# Altium PCB BEAGLEPLAYV020_220915.brd.PcbDoc (part 8 of 12)
Units mil, origin at the board's own origin, x right, y up, seen from the top; angles counter-clockwise.
Board outline 3149.7 x 3149.7 mil, 8 copper layers (TOP, LYR2_GND, LYR3, LAY4_PWR1, LAY5_PWR2, LAY6, LYR7_GND, BOTTOM), stack 60.84 mil thick; 782 components, 546 nets, 2864 pads, 2056 vias.
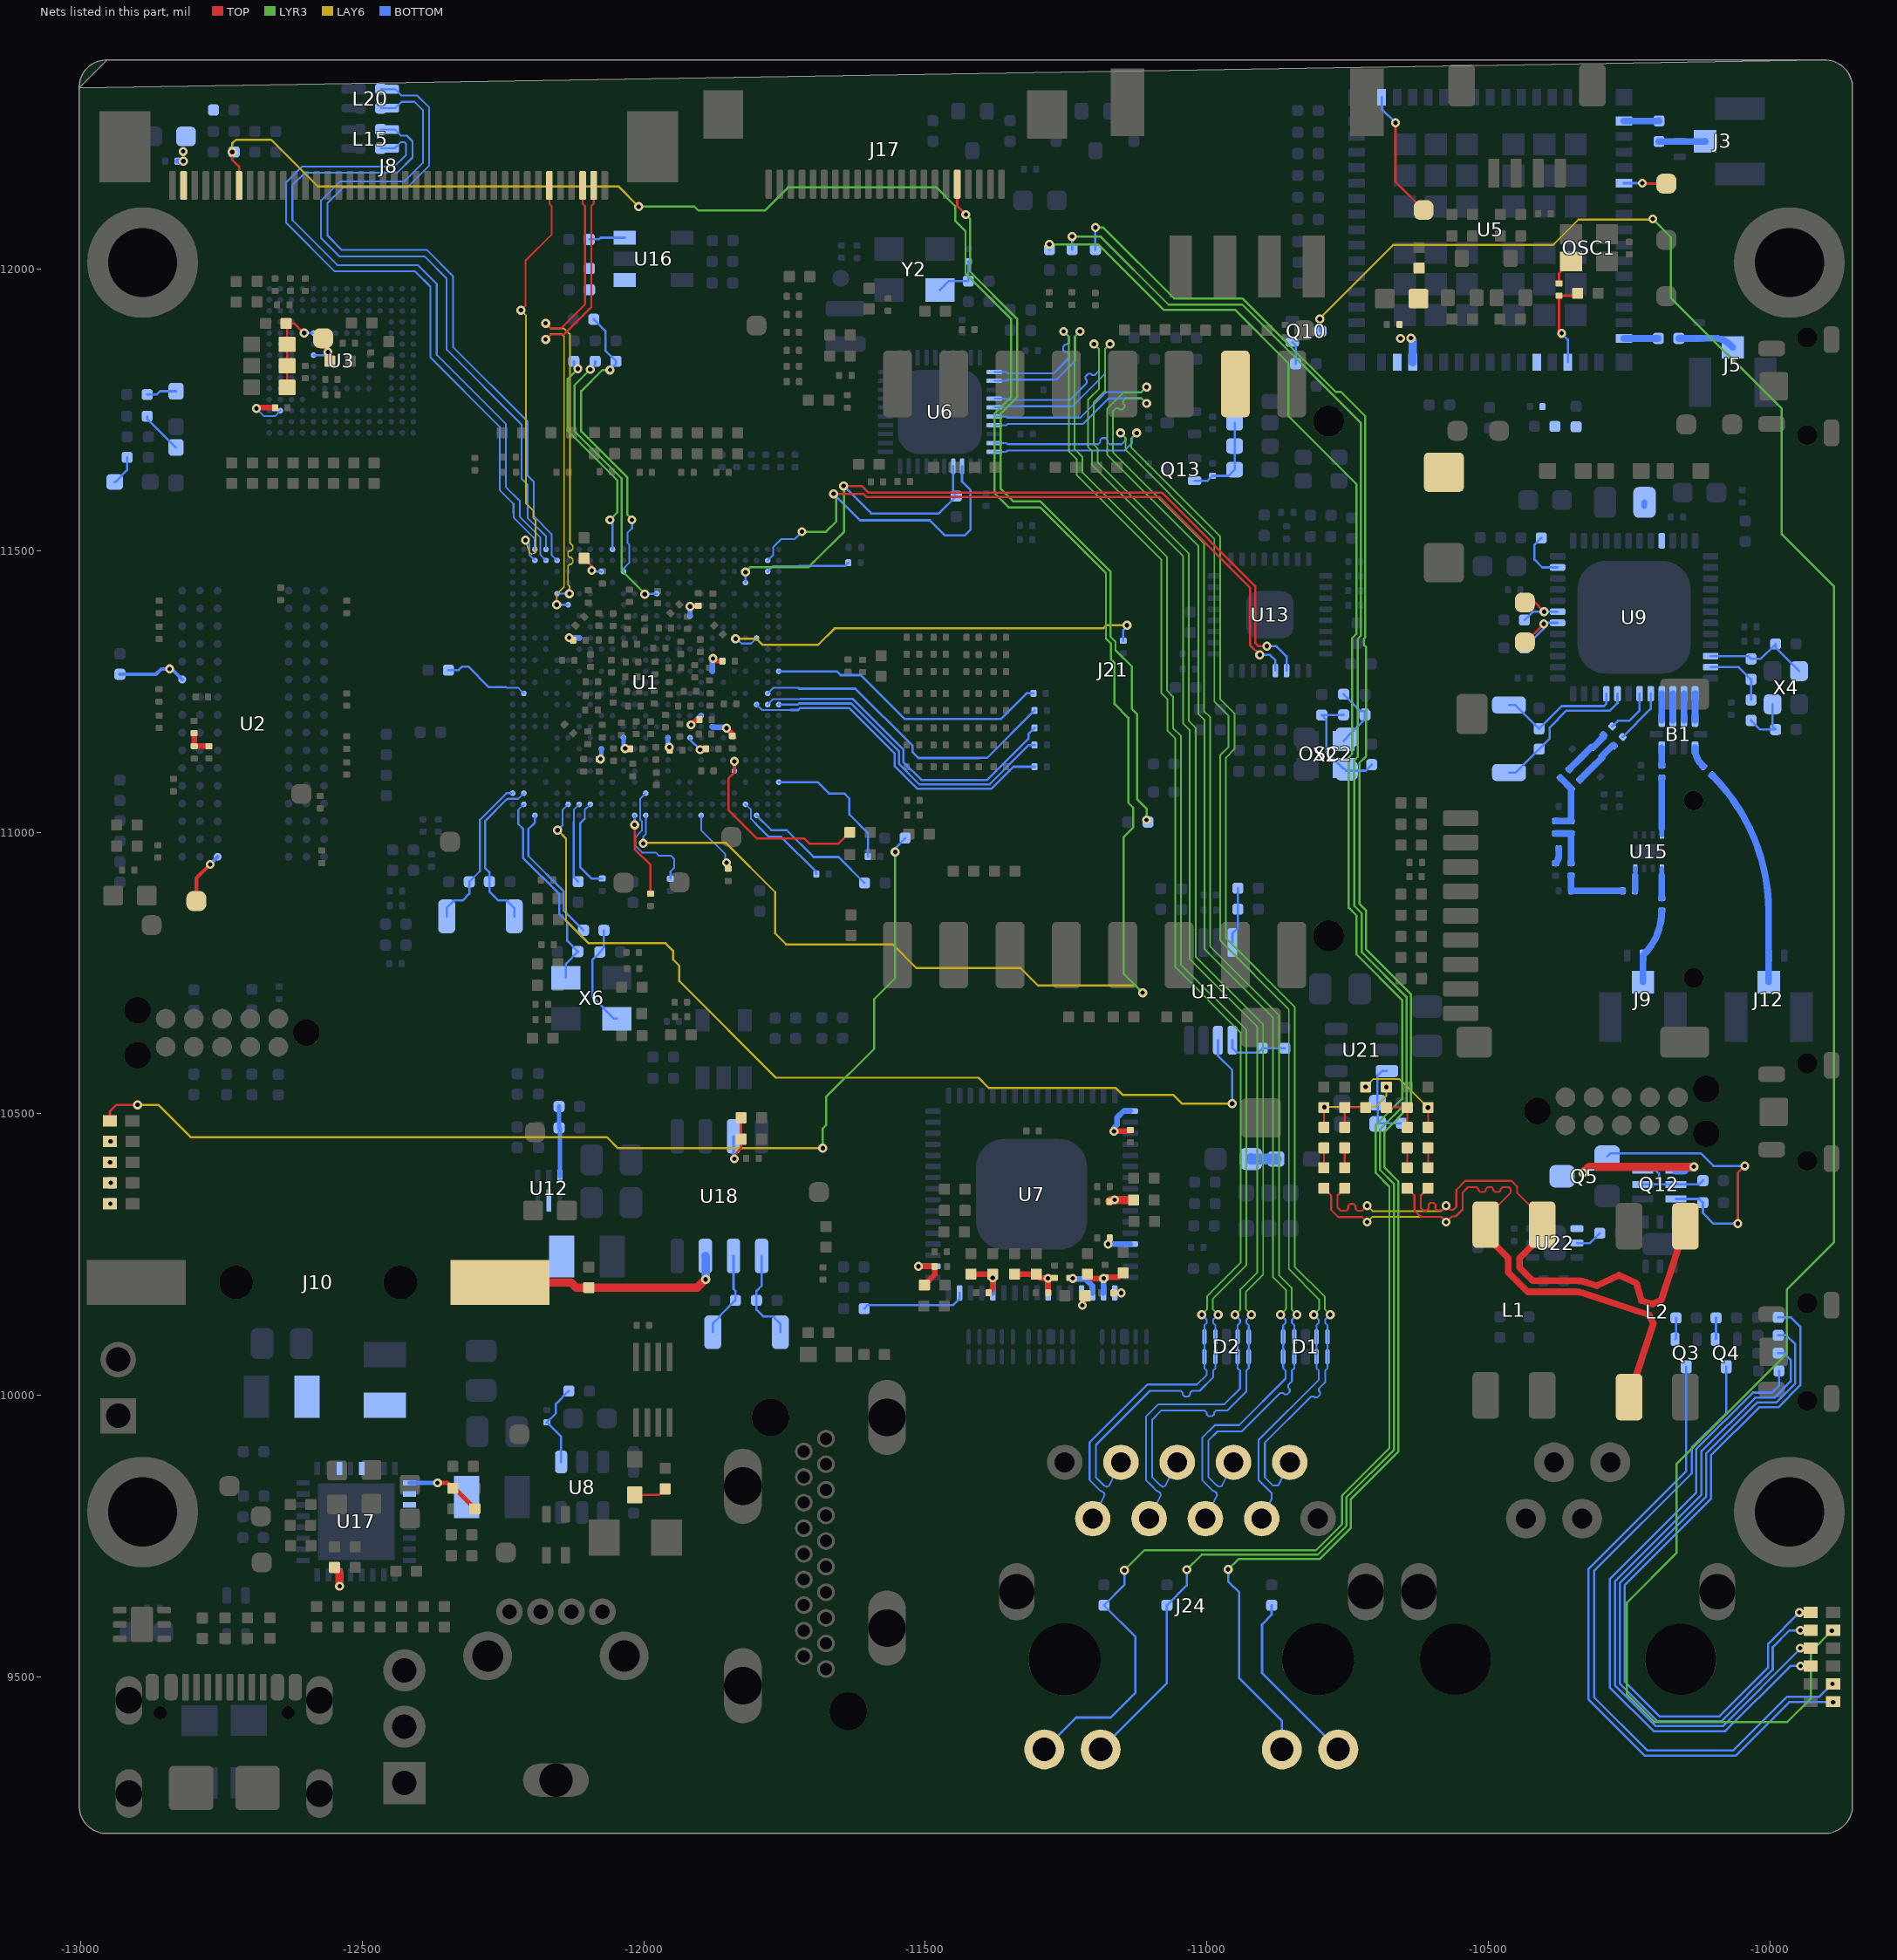
[diagram p14: the nets of this part, all layers, seen from the top]

## Via types
v1: diameter 16/0/16/0/0/0/0/16 (per signal layer), hole 8, TOP to BOTTOM, 334 vias
v2: diameter 16/16/0/0/0/0/16/16 (per signal layer), hole 8, TOP to BOTTOM, 282 vias
v3: diameter 16/0/0/0/0/16/0/16 (per signal layer), hole 8, TOP to BOTTOM, 255 vias
v4: diameter 16/16/0/0/0/16/16/16 (per signal layer), hole 8, TOP to BOTTOM, 253 vias
v5: diameter 16, hole 8, TOP to BOTTOM, 212 vias
v6: diameter 16/16/16/0/0/16/16/16 (per signal layer), hole 8, TOP to BOTTOM, 173 vias
v7: diameter 16/0/0/16/0/0/0/16 (per signal layer), hole 8, TOP to BOTTOM, 131 vias
v8: diameter 16/0/0/0/16/0/0/16 (per signal layer), hole 8, TOP to BOTTOM, 98 vias
v9: diameter 16/16/0/16/0/0/16/16 (per signal layer), hole 8, TOP to BOTTOM, 93 vias
v10: diameter 16/0/16/0/0/16/0/16 (per signal layer), hole 8, TOP to BOTTOM, 87 vias
v11: diameter 16/16/0/16/0/16/16/16 (per signal layer), hole 8, TOP to BOTTOM, 44 vias
v12: diameter 16/16/16/16/0/16/16/16 (per signal layer), hole 8, TOP to BOTTOM, 40 vias
v13: diameter 16/16/16/0/0/0/16/16 (per signal layer), hole 8, TOP to BOTTOM, 19 vias
v14: diameter 16/0/0/16/0/16/0/16 (per signal layer), hole 8, TOP to BOTTOM, 15 vias
v15: diameter 16/0/0/0/16/16/0/16 (per signal layer), hole 8, TOP to BOTTOM, 13 vias
v16: diameter 16/0/16/0/16/0/0/16 (per signal layer), hole 8, TOP to BOTTOM, 3 vias
v17: diameter 16/0/16/16/0/0/0/16 (per signal layer), hole 8, TOP to BOTTOM, 3 vias
v18: diameter 16/16/16/16/0/0/16/16 (per signal layer), hole 8, TOP to BOTTOM, 1 vias

## Nets (pads, with @x,y where several pads share a name; then routed paths per layer and width w, separated by ;. In a path a pad name is that pad's centre, name@x,y a point inside that pad or via, vN(x,y) a via of type N, cw(c..) or ccw(c..) an arc to the next point about the centre after c; other vN are vias at no path point) (continued)
MCU_SPI1_D1: U1.B6 U11.6 | length 1686.2
  LAY6 w3.8: v3(-12153,11003.7) -12138,10988.7 -12138,10843 -12098,10803 -11961.34,10803 -11948,10789.66 -11948,10780 -11947.8,10779.8 -11947.8,10773.8 -11937,10763 -11937,10735.96 -11765.24,10564.2 -11405.48,10564.2 -11387.1,10545.82 -11161.59,10545.82 -11149.17,10533.4 -11059.36,10533.4 -11044.16,10518.2 v3(-10955,10518.2)
  BOTTOM w3.2: v3(-12153,11003.7) -12144.1,11012.6 -12144.1,11039.86 U1.B6@-12134.3,11049.66
  BOTTOM w4: U11.6@-10980.23,10630.76 -10980.23,10603.23 -10955,10578 v3(-10955,10518.2)
MDI0+: D2.5 D2.6 J24.2 U6.1 | length 2637.2
  LYR3 w3: v1(-11254.42,11889.43) -11245,11880.01 -11245,11675.99 -11231,11661.99 -11231,11634.43 -11081,11484.43 -11081,11247.43 -11070.3,11236.73 -11070.3,11180.74 -11056,11166.44 -11056,10760.43 -10940,10644.43 -10940,10235.57 -10999.68,10175.89 -10999.68,10152.63 v1(-11009.03,10143.28)
  BOTTOM w3.3: U6.1@-11377.67,11817.29 -11356.17,11817.29 -11353.94,11815.06 -11271.94,11815.06 -11245,11842 -11245,11849.48 -11248.3,11852.78 -11251.7,11852.78 -11255,11856.08 -11255,11862.68 -11251.7,11865.98 -11248.3,11865.98 -11245,11869.28 -11245,11880.01 v1(-11254.42,11889.43) ; J24.2@-11202.58,9781.2 -11181.56,9823.17 -11183.05,9827.6 -11188.9,9830.53 -11208.23,9849.87 -11208.23,9916.76 -11105.69,10019.3 -11017.48,10019.3 -11000.18,10036.6 -11000.18,10044.03 -11004.37,10048.22 D2.5@-11004.37,10068.65 D2.6@-11004.37,10104.09 -11004.37,10124.52 -11000.18,10128.71 -11000.18,10134.43 v1(-11009.03,10143.28)
MDI0-: D2.4 D2.7 J24.3 U6.2 | length 2642.4
  LYR3 w3: v1(-11225.42,11889.43) -11234.7,11880.15 -11234.7,11680.26 -11220.7,11666.26 -11220.7,11638.7 -11070.7,11488.7 -11070.7,11251.7 -11060,11241 -11060,11185.01 -11045.7,11170.71 -11045.7,10764.7 -10929.7,10648.7 -10929.7,10231.3 -10989.38,10171.62 -10989.38,10152.63 v1(-10980.03,10143.28)
  BOTTOM w3.3: U6.2@-11377.67,11801.54 -11356.16,11801.54 -11353.94,11803.76 -11267.25,11803.76 -11233.7,11837.31 -11233.7,11881.15 v1(-11225.42,11889.43) ; J24.3@-11152.58,9881.2 -11173.61,9839.21 -11178.04,9837.74 -11182.2,9839.82 -11196.93,9854.55 -11196.93,9912.07 -11101,10008 -11046.13,10008 -11042.83,10004.7 -11042.83,10001.3 -11039.53,9998 -11032.93,9998 -11029.63,10001.3 -11029.63,10004.7 -11026.33,10008 -11012.79,10008 -10988.88,10031.91 -10988.88,10044.03 -10984.69,10048.22 D2.4@-10984.69,10068.65 D2.7@-10984.69,10104.09 -10984.69,10124.52 -10988.88,10128.71 -10988.88,10134.43 v1(-10980.03,10143.28)
MDI1+: D2.2 D2.9 J24.4 U6.4 | length 2672.3
  LYR3 w3: v1(-11200.47,11867) -11191.3,11857.83 -11191.3,11787.71 -11211.3,11767.71 -11211.3,11684.74 -11204.3,11677.74 -11204.3,11652.73 -11042.3,11490.73 -11042.3,11193.3 -11030.3,11181.3 -11030.3,10774.73 -10910.3,10654.73 -10910.3,10218.7 -10940.62,10188.38 -10940.62,10152.63 v1(-10949.97,10143.28)
  BOTTOM w3.3: U6.4@-11377.67,11770.04 -11356.17,11770.04 -11353.94,11767.81 -11243.19,11767.81 -11213.15,11797.85 -11213.15,11802.51 -11215.49,11804.85 -11215.49,11809.51 -11210.81,11814.19 -11206.15,11814.19 -11203.81,11811.85 -11199.15,11811.85 -11191.8,11819.2 -11191.8,11858.33 v1(-11200.47,11867) ; J24.4@-11102.58,9781.2 -11081.56,9823.17 -11083.05,9827.6 -11088.9,9830.53 -11097.56,9839.19 -11108.23,9849.87 -11108.23,9961.76 -11085.69,9984.3 -10968.7,9984.3 -10941.12,10011.88 -10941.12,10044.03 -10945.31,10048.22 D2.2@-10945.31,10068.65 D2.9@-10945.31,10104.09 -10945.31,10124.52 -10941.12,10128.71 -10941.12,10134.43 v1(-10949.97,10143.28)
MDI1-: D2.1 D2.10 J24.5 U6.5 | length 2678.1
  LYR3 w3: v1(-11171.82,11867) -11181,11857.82 -11181,11783.44 -11201,11763.44 -11201,11689.01 -11194,11682.01 -11194,11657 -11032,11495 -11032,11197.57 -11020,11185.57 -11020,10779 -10900,10659 -10900,10214.43 -10930.32,10184.11 -10930.32,10152.63 v1(-10920.97,10143.28)
  BOTTOM w3.3: U6.5@-11377.67,11754.29 -11356.16,11754.29 -11353.94,11756.51 -11238.5,11756.51 -11180.5,11814.51 -11180.5,11858.32 v1(-11171.82,11867) ; J24.5@-11052.58,9881.2 -11073.61,9839.21 -11078.04,9837.74 -11082.19,9839.82 -11096.93,9854.56 -11096.93,9957.07 -11081,9973 -11003.63,9973 -11000.33,9969.7 -11000.33,9966.3 -10997.03,9963 -10990.43,9963 -10987.13,9966.3 -10987.13,9969.7 -10983.83,9973 -10964.01,9973 -10929.82,10007.19 -10929.82,10044.03 -10925.63,10048.22 D2.1@-10925.63,10068.65 D2.10@-10925.63,10104.09 -10925.63,10124.52 -10929.82,10128.71 -10929.82,10134.43 v1(-10920.97,10143.28)
MDI2+: D1.5 D1.6 J24.6 U6.6 | length 2596.7
  LYR3 w3: v1(-11107,11790.57) -11116.57,11781 -11148,11781 -11176.98,11752.02 -11176.98,11670.41 -11015.3,11508.73 -11015.3,11210.73 -11004.3,11199.73 -11004.3,10792.73 -10882.3,10670.73 -10882.3,10209.73 -10859.68,10187.11 -10859.68,10152.63 v1(-10869.03,10143.28)
  BOTTOM w3.3: U6.6@-11377.67,11738.55 -11356.16,11738.55 -11353.94,11736.33 -11224.67,11736.33 -11179.28,11781.72 -11115.85,11781.72 v1(-11107,11790.57) ; J24.6@-11002.58,9781.2 -10981.56,9823.17 -10983.05,9827.6 -10988.9,9830.53 -11008.3,9849.94 -11008.3,9924.69 -10985.69,9947.3 -10942.69,9947.3 -10860.18,10029.81 -10860.18,10044.03 -10864.37,10048.22 D1.5@-10864.37,10068.65 D1.6@-10864.37,10104.09 -10864.37,10124.52 -10860.18,10128.71 -10860.18,10134.43 v1(-10869.03,10143.28)
MDI2-: D1.4 D1.7 J24.7 U6.7 | length 2591.8
  LYR3 w3: v1(-11107,11761.57) -11116.13,11770.7 -11143.73,11770.7 -11148.72,11765.71 -11148.72,11761.48 -11146.24,11759 -11146.24,11754.76 -11150.49,11750.51 -11154.73,11750.51 -11157.21,11752.98 -11161.45,11752.98 -11166.68,11747.75 -11166.68,11674.68 -11005,11513 -11005,11215 -10994,11204 -10994,10797 -10872,10675 -10872,10214 -10849.38,10191.38 -10849.38,10152.63 v1(-10840.03,10143.28)
  BOTTOM w3.3: U6.7@-11377.67,11722.8 -11356.17,11722.8 -11353.94,11725.03 -11219.98,11725.03 -11174.59,11770.42 -11115.85,11770.42 v1(-11107,11761.57) ; J24.7@-10952.58,9881.2 -10973.61,9839.21 -10978.04,9837.74 -10982.19,9839.82 -10997,9854.63 -10997,9920 -10981,9936 -10938,9936 -10869.51,10004.49 -10864.85,10004.49 -10862.01,10001.65 -10857.35,10001.65 -10852.67,10006.33 -10852.67,10010.99 -10855.51,10013.83 -10855.51,10018.49 -10848.88,10025.12 -10848.88,10044.03 -10844.69,10048.22 D1.4@-10844.69,10068.65 D1.7@-10844.69,10104.09 -10844.69,10124.52 -10848.88,10128.71 -10848.88,10134.43 v1(-10840.03,10143.28)
MDI3+: D1.2 D1.9 J24.8 U6.9 | length 2423.2
  LYR3 w3: v1(-11153.18,11709) -11144.3,11700.12 -11144.3,11678.74 -10986.8,11521.24 -10986.8,11232.23 -10961.3,11206.73 -10961.3,11151.71 -10976.3,11136.71 -10976.3,10807.74 -10854.3,10685.74 -10854.3,10224.3 -10800.62,10170.62 -10800.62,10152.63 v1(-10809.97,10143.28)
  BOTTOM w3.3: U6.9@-11377.67,11691.3 -11356.17,11691.3 -11353.94,11689.07 -11192.78,11689.07 -11189.48,11692.37 -11189.48,11696.7 -11186.18,11700 -11179.58,11700 -11176.28,11696.7 -11176.28,11692.37 -11172.98,11689.07 -11151.08,11689.07 -11144.5,11695.65 -11144.5,11700.32 v1(-11153.18,11709) ; J24.8@-10902.58,9781.2 -10885.14,9816.02 -10885.14,9826.81 -10908.23,9849.87 -10908.23,9920.77 -10801.12,10027.88 -10801.12,10044.03 -10805.31,10048.22 D1.2@-10805.31,10068.65 D1.9@-10805.31,10104.09 -10805.31,10124.52 -10801.12,10128.71 -10801.12,10134.43 v1(-10809.97,10143.28)
MDI3-: D1.1 D1.10 J24.9 U6.10 | length 2427.6
  LYR3 w3: v1(-11124.53,11709) -11134,11699.53 -11134,11683.01 -10976.5,11525.51 -10976.5,11236.5 -10951,11211 -10951,11147.44 -10966,11132.44 -10966,10812.01 -10844,10690.01 -10844,10228.57 -10790.32,10174.89 -10790.32,10152.63 v1(-10780.97,10143.28)
  BOTTOM w3.3: U6.10@-11377.67,11675.55 -11356.16,11675.55 -11353.94,11677.77 -11146.39,11677.77 -11133.2,11690.96 -11133.2,11700.33 v1(-11124.53,11709) ; J24.9@-10852.58,9881.2 -10873.3,9839.83 -10882.17,9839.83 -10896.93,9854.56 -10896.93,9916.08 -10814.92,9998.09 -10810.26,9998.09 -10808.42,9996.26 -10803.76,9996.26 -10799.08,10000.94 -10799.08,10005.59 -10800.92,10007.43 -10800.92,10012.09 -10789.82,10023.19 -10789.82,10044.03 -10785.63,10048.22 D1.1@-10785.63,10068.65 D1.10@-10785.63,10104.09 -10785.63,10124.52 -10789.82,10128.71 -10789.82,10134.43 v1(-10780.97,10143.28)
MDIO0_MDC: U1.AD24 U6.13 U13.12 | length 1592.2
  TOP w4: v1(-11663,11601) -11610.32,11601 -11604.62,11595.3 -11084.3,11595.3 -10923,11433.98 -10923,11332 -10906.07,11315.07 v5(-10906.07,11314.91)
  LYR3 w3.8: -11697,11533.7 -11676.3,11533.7 -11658,11552 -11658,11596 v1(-11663,11601)
  LYR3 w4: v1(-11719,11533.7) -11697,11533.7
  BOTTOM w3.2: U1.AD24@-11779.96,11482.74 -11770.08,11492.62 -11770.08,11506.62 -11756,11520.7 -11732,11520.7 v1(-11719,11533.7)
  BOTTOM w4: v1(-11663,11601) -11616,11554 -11492,11554 -11465,11527 -11430,11527 -11420,11537 -11420,11608 -11434.76,11622.76 U6.13@-11434.76,11649.96 ; v5(-10906.07,11314.91) -10887.91,11314.91 -10878.15,11305.15 U13.12@-10878.15,11287
MDIO0_MDIO: R263.2 U1.AB22 U6.14 U13.11 | length 1590.1
  TOP w4: v1(-11645,11615) -11613,11615 -11601.3,11603.3 -11080.3,11603.3 -10914,11437 -10914,11336 -10908.4,11330.4 v5(-10893.41,11330.4)
  LYR3 w3.8: -11697,11481 -11644,11534 -11644,11614 v1(-11645,11615)
  LYR3 w4: v1(-11819.34,11462) -11810.34,11471 -11707,11471 -11697,11481
  BOTTOM w4: U1.AB22@-11819.34,11443.36 v1(-11819.34,11462) ; v1(-11645,11615) -11596,11566 -11475.96,11566 R263.2@-11445,11596.96 -11450.51,11602.47 U6.14@-11450.51,11649.96 ; v5(-10893.41,11330.4) -10876.4,11330.4 -10858.45,11312.45 U13.11@-10858.45,11287
MST_RST_3V3: J8.34 R242.1 U1.A13 | length 4147.2
  TOP w4: v3(-12731,12208) -12731,12194.5 -12718.75,12182.25 J8.34@-12718.75,12148.55
  LYR3 w3.8: v10(-12009,12111) -11910,12111 -11903,12104 -11785,12104 -11744,12145 -11479.99,12145 -11447,12112.01 -11447,12086 -11428.6,12067.6 -11428.6,11992.52 -11348,11911.92 -11348,11772.56 -11377.04,11743.52 -11377.04,11602.04 -11352,11577 -11296.23,11577 -11247.53,11528.3 -11247.44,11528.3 -11215.8,11496.66 -11215.8,11496.57 -11179.2,11459.97 -11179.2,11344.24 -11170,11335.04 -11170,11307 -11163.9,11300.9 -11163.9,11227.63 -11139.6,11203.33 -11139.6,11052.52 -11131,11043.92 -11131,11008 -11148,10991 -11148,10749 v10(-11114,10715)
  LAY6 w3.8: v3(-12731,12208) -12731,12223 -12724,12230 -12662,12230 -12579,12147 -12045,12147 v10(-12009,12111) ; v3(-12001.06,10980.21) -12000.27,10981 -11854,10981 -11766.66,10893.66 -11766.66,10820.34 -11747.32,10801 -11558,10801 -11515.7,10758.7 -11330.7,10758.7 -11300,10728 -11127,10728 v10(-11114,10715)
  BOTTOM w3.2: v3(-12001.06,10980.21) -12001.06,10991.94 -11996.5,10996.5 U1.A13@-11996.5,11029.98
N8480473: C76.1 U3.C2 | length 86.1
  TOP w10: v5(-12688,11752.7) -12686.66,11754.04 C76.1@-12654.84,11754.04
  BOTTOM w3.2: v5(-12688,11752.7) -12674.21,11738.91 -12655.19,11738.91 U3.C2@-12645.39,11748.71
N8487606: R80.1 U1.B22 | length 188.6
  BOTTOM w3.2: U1.B22@-11819.34,11049.66 -11809.54,11039.86 -11809.54,11023.54 -11801,11015
  BOTTOM w4: -11801,11015 -11778,10992 -11756,10992 -11693.7,10929.7 R80.1@-11693.7,10926
N8498391: R79.1 U1.D25 | length 254
  BOTTOM w3.8: R79.1@-11602,10956.95 -11602,10998.68
  BOTTOM w4: U1.D25@-11760.28,11089.04 -11691.04,11089.04 -11671,11069 -11644,11069 -11635,11060 -11635,11031.68 -11602,10998.68
N8502406: D47.1 D48.1 D56.1 R14.2 U3.K5 | length 170.1
  TOP w4: D56.1@-12633.48,11790 D48.1@-12633.48,11828.42 D47.1@-12633.48,11866.36 -12633.48,11901.89 R14.2@-12635.15,11903.56 -12620.26,11903.56 v5(-12603.2,11886.5)
  BOTTOM w4: v5(-12603.2,11886.5) U3.K5@-12586.33,11886.5
N8504005: TP6.1 U5.2 | length 231.1
  TOP w4: v5(-10665,12260) -10665,12155 TP6.1@-10615,12105
  BOTTOM w4: U5.2@-10689.55,12305.24 -10689.55,12284.55 v5(-10665,12260)
N8504092: TP7.1 U5.22 | length 75.9
  TOP w4: v5(-10226.68,12152.68) -10225.89,12151.89 TP7.1@-10183.83,12151.89
  BOTTOM w4: U5.22@-10259.44,12152.68 v5(-10226.68,12152.68)
N8504621: C83.1 C84.1 FB1.2 U5.46 U5.47 | length 44
  BOTTOM w15: v5(-10637.5,11877.5) -10634.44,11874.44 U5.46@-10634.44,11834.76
  other v5: -10656,11877
N8505525: C85.1 C86.1 FB2.2 U5.38
N8507580: C256.1 U5.18 | length 62.6
  BOTTOM w12: U5.18@-10259.44,12262.91 -10197.3,12262.91 C256.1@-10197,12263.21
N8507584: C257.1 U5.32 | length 61.3
  BOTTOM w12: U5.32@-10259.44,11877.09 -10198.3,11877.09 C257.1@-10198.21,11877
N8521467: OSC1.3 R31.1 | length 47.6
  TOP w4: R31.1@-10374.5,11974.8 -10374.5,11992.38 OSC1.3@-10353.29,12013.59
N8521963: R30.2 R31.2 U5.36 | length 159.4
  TOP w4: v5(-10370,11886) -10374.5,11890.5 R31.2@-10374.5,11952.8 -10345.61,11952.8 R30.2@-10341.41,11957
  BOTTOM w4: v5(-10370,11886) -10358.84,11874.84 U5.36@-10358.84,11834.76
N8554336: R258.1 U7.17 | length 25.3
  TOP w4: R258.1@-11165.7,10182 v5(-11152,10182)
  BOTTOM w4: U7.17@-11163.59,10182 v5(-11152,10182)
N15874060: R1.1 U2.F9 | length 122.4
  BOTTOM w6.6: R1.1@-12930.44,11280.59 -12866.33,11280.56 -12856.89,11290 v5(-12842.09,11290) -12838.21,11290 U2.F9@-12819.66,11271.45
N15874116: TP11.1 U2.T7 | length 94.3
  TOP w6.6: TP11.1@-12794.55,10877.84 -12794.55,10918.56 v5(-12770.1,10943.01)
  BOTTOM w6.6: v5(-12770.1,10943.01) U2.T7@-12756.66,10956.45
N15878591: C82.1 R2.2 R3.2 | length 49.2
  TOP w10: C82.1@-12798.7,11176 -12798.3,11175.6 R3.2@-12798.3,11153 R2.2@-12772.3,11153
N15909544: R88.2 U1.M2 | length 156.4
  BOTTOM w3.2: -12274.85,11257.7 -12244,11257.7 -12242.62,11256.32 -12222.84,11256.32 U1.M2@-12213.04,11246.52
  BOTTOM w4: R88.2@-12346.95,11287.84 -12329.11,11287.84 -12322.65,11294.3 -12311.45,11294.3 -12274.85,11257.7
N15925896: R89.1 U7.20 | length 41.8
  TOP w4: v5(-11221,10160) -11215.79,10165.21 R89.1@-11215.79,10177
  BOTTOM w4: U7.20@-11222.65,10182 -11222.65,10161.65 v5(-11221,10160)
N15938500: C1.2 C254.1 OSC2.4 R220.1 R221.2 X2.4 | length 119.2
  BOTTOM w4: X2.4@-10757.17,11162.07 -10751.6,11167.64 OSC2.4@-10751.6,11168.53 -10719.14,11200.99 R220.1@-10719.14,11208.11 C254.1@-10719.14,11215.02 -10727.05,11215.02 C1.2@-10757.14,11245.11
N15938564: C1.1 OSC2.1 R99.2 R221.1 R222.1 X2.1 | length 206.6
  BOTTOM w4: C1.1@-10757.14,11208.69 -10757.64,11208.19 R99.2@-10795.86,11208.19 -10788,11200.33 -10788,11143 -10758.85,11113.85 X2.1@-10757.17,11113.85 -10752.79,11109.47 OSC2.1@-10751.6,11109.47 -10717.86,11109.47 R222.1@-10707.14,11120.19
N15941863: C12.1 R100.2 R104.1 | length 72.5
  TOP w3.3: C12.1@-10755.14,10475.97 R100.2@-10755.14,10511.23 R104.1@-10717.86,10511.23
N15941865: C13.1 R101.2 R105.1 | length 170.7
  TOP w3.3: C13.1@-10792.14,10475.97 R101.2@-10792.14,10511.11 v3(-10791.3,10512) ; v3(-10681.35,10547.65) R105.1@-10681.14,10547.65
  LAY6 w3: v3(-10791.3,10512) -10701,10512 -10681.35,10531.65 v3(-10681.35,10547.65)
N15941871: C15.1 R102.2 R104.2 | length 172.9
  TOP w3.3: v3(-10607.23,10511.23) R102.2@-10607.14,10511.23 C15.1@-10607.14,10475.97
  LAY6 w3: v3(-10718,10548) -10704,10562 -10658,10562 v3(-10607.23,10511.23)
N15941883: C14.1 R103.2 R105.2 | length 72.3
  TOP w3.3: R105.2@-10681.14,10511.23 R103.2@-10644.14,10511.23 C14.1@-10644.14,10475.97
N15942115: C12.2 R106.1 | length 35.2
  TOP w3.3: R106.1@-10755.14,10404.33 C12.2@-10755.14,10439.55
N15942117: C13.2 R107.1 | length 35.2
  TOP w3.3: R107.1@-10792.14,10404.33 C13.2@-10792.14,10439.55
N15942312: C15.2 R109.1 | length 35.2
  TOP w3.3: R109.1@-10607.14,10404.33 C15.2@-10607.14,10439.55
N15942316: C14.2 R108.1 | length 35.2
  TOP w3.3: R108.1@-10644.14,10404.33 C14.2@-10644.14,10439.55
N15942320: L1.2 L2.3 R107.2 R108.2 | length 1161.5
  TOP w3.3: R107.2@-10792.14,10367.91 -10779.29,10355.06 -10779.29,10329.3 -10766.69,10316.7 -10724.1,10316.7 v3(-10715.25,10307.85) ; R108.2@-10644.14,10367.91 -10631.3,10355.07 -10631.3,10328.3 -10620,10317 -10584.15,10317 v3(-10575,10307.85) -10564.89,10317.96 -10558.05,10317.96 -10545.7,10330.31 -10545.7,10360.31 -10536.31,10369.7 -10520.98,10369.7 -10517.68,10366.4 -10517.68,10364.3 -10514.38,10361 -10507.78,10361 -10504.48,10364.3 -10504.48,10366.4 -10501.18,10369.7 -10494.58,10369.7 -10491.28,10366.4 -10491.28,10364.3 -10487.98,10361 -10481.38,10361 -10478.08,10364.3 -10478.08,10366.4 -10474.78,10369.7 -10463.6,10369.7 -10460.3,10366.4 -10460.3,10360 -10504.66,10315.64 L1.2@-10504.66,10303.21
  TOP w12: L1.2@-10504.66,10303.21 -10504.66,10283.87 -10464.66,10243.87 -10464.66,10218.6 -10429.8,10183.74 -10344.36,10183.74 cw(c-10344.38,10146.12) -10332.58,10181.84 -10214.54,10142.9 -10206.89,10127.75 L2.3@-10250,9997.07
  LAY6 w3: v3(-10715.25,10307.85) -10705.9,10317.2 -10584.35,10317.2 v3(-10575,10307.85)
N15942332: L1.1 L2.1 R106.2 R109.2 | length 1156.9
  TOP w3.3: R106.2@-10755.14,10367.91 -10767.99,10355.06 -10767.99,10333.99 -10762,10328 -10752.31,10328 -10749.01,10331.3 -10749.01,10336.7 -10745.71,10340 -10739.11,10340 -10735.81,10336.7 -10735.81,10331.3 -10732.51,10328 -10724.1,10328 v3(-10715.25,10336.85) ; R109.2@-10607.14,10367.91 -10620,10355.05 -10620,10332.99 -10615.31,10328.3 -10609.7,10328.3 -10606,10332 -10606,10339 -10603,10342 -10597,10342 -10594,10339 -10594,10332.05 -10590.7,10328.75 -10583.1,10328.75 v3(-10575,10336.85) -10567.41,10329.26 -10562.74,10329.26 -10557,10335 -10557,10365 -10541,10381 -10458.91,10381 -10449,10371.09 -10449,10360 -10404.66,10315.66 L1.1@-10404.66,10303.21
  TOP w12: L1.1@-10404.66,10303.21 -10404.66,10283.87 -10444.66,10243.87 -10444.66,10226.89 -10421.51,10203.74 -10344.36,10203.74 cw(c-10344.36,10146.12) -10326.31,10200.84 -10307.67,10194.69 -10268.22,10213.46 -10237.31,10199.1 -10228.17,10168.47 -10208.26,10161.9 -10193.11,10169.53 L2.1@-10150,10300.21
  LAY6 w3: v3(-10715.25,10336.85) -10705.9,10327.5 -10584.35,10327.5 v3(-10575,10336.85)
N15956159: B1.7 U9.3 | length 47
  BOTTOM w12: B1.7@-10172.32,11198.95 U9.3@-10172.32,11245.95
N15956167: B1.4 C19.1 | length 31
  BOTTOM w12: C19.1@-10192.01,11118.73 B1.4@-10192.01,11149.73
N15956223: B1.6 U9.4 | length 47
  BOTTOM w12: B1.6@-10192.01,11198.95 U9.4@-10192.01,11245.95
N15956457: C19.2 U15.8 | length 101.6
  BOTTOM w8: U15.8@-10192.01,10995.14 -10192.01,11007
  BOTTOM w12: -10192.01,11007 C19.2@-10192.01,11096.73
N15956717: L3.2 U9.33 | length 7
  BOTTOM w10: L3.2@-10222.8,11578.8 L3.2@-10222.8,11585.78
N15956763: C21.1 U15.1 | length 53.1
  BOTTOM w8: -10192.01,10923.22 U15.1@-10192.01,10936.08
  BOTTOM w12: C21.1@-10192.01,10883 -10192.01,10923.22
N15956767: C21.2 D28.2 J9.1 | length 136.1
  BOTTOM w12: J9.1@-10225.57,10734.02 D28.2@-10225.57,10781 -10224.85,10781.72 ccw(c-10304.13,10861) C21.2@-10192.01,10861
N15956835: C25.1 U15.4 | length 40.2
  BOTTOM w8: -10239.25,10923.22 U15.4@-10239.25,10936.08
  BOTTOM w12: C25.1@-10239.57,10896 -10239.25,10896.32 -10239.25,10923.22
N15956943: C33.1 U9.8 X3.1 | length 271.9
  BOTTOM w4: X3.1@-10463.47,11106.13 -10451.3,11106.13 C33.1@-10409.64,11147.79 -10391,11166.43 -10391,11186 -10361,11216 -10283.99,11216 -10270.75,11229.24 U9.8@-10270.75,11245.95
N15956969: C34.1 U9.9 X3.2 | length 226.6
  BOTTOM w4: X3.2@-10463.47,11226.13 -10452.44,11226.13 C34.1@-10409.96,11183.65 -10369.61,11224 -10294.99,11224 -10290.43,11228.56 U9.9@-10290.43,11245.95
N15956977: C26.1 L5.1 L6.2 L7.2 | length 87.2
  BOTTOM w12: C26.1@-10337.53,11093.23 L5.1@-10316.65,11114.12 -10297.65,11133.12 L7.2@-10297.65,11135.91 -10279.81,11153.75 L6.2@-10277.01,11153.75
N15957113: L6.1 U9.5 | length 97.3
  BOTTOM w4: L6.1@-10261.45,11169.31 -10211.69,11219.07 U9.5@-10211.69,11245.95
N15957129: C26.2 C27.1 C31.1 L9.1 L11.2 | length 111.5
  BOTTOM w12: L9.1@-10380.52,11020 C27.1@-10353.09,11020 C31.1@-10353.09,11046.04 C26.2@-10353.09,11077.67 L11.2@-10371.77,11096.35
N15957145: C27.2 C28.1 L8.1 L9.2 | length 80.4
  BOTTOM w12: L9.2@-10380.52,10998 C27.2@-10353.09,10998 C28.1@-10353.09,10970.99 L8.1@-10353.09,10945
N15957153: C25.2 C29.1 L8.2 | length 118.5
  BOTTOM w12: L8.2@-10353.09,10923 C29.1@-10353.09,10896 C25.2@-10261.57,10896
N15957165: L10.1 U9.6 | length 89.9
  BOTTOM w4: L10.1@-10280.14,11187.99 -10270.13,11198 -10250,11198 -10231.38,11216.62 U9.6@-10231.38,11245.95
N15957287: C32.1 U9.23 | length 90.3
  BOTTOM w4: C32.1@-10406.05,11522.72 -10418,11510.77 -10418,11484 -10404.36,11470.36 U9.23@-10377.05,11470.36
N15957295: C36.1 R118.2 U9.46 X4.3 | length 194.1
  BOTTOM w4: U9.46@-10105.39,11312.88 -10038.57,11312.88 R118.2@-10033.44,11307.75 -10016.44,11307.75 C36.1@-9989.83,11334.36 -9989.83,11328.1 X4.3@-9948,11286.27
N15957337: R118.1 R119.1 U9.47 | length 117.3
  BOTTOM w4: U9.47@-10105.39,11293.2 -10055.31,11293.2 R118.1@-10033.44,11271.33 R119.1@-10033.44,11234.99
N15957501: C30.1 L7.1 L10.2 L11.1 | length 87.6
  BOTTOM w12: L11.1@-10356.21,11111.91 C30.1@-10335.44,11132.69 -10316.66,11151.47 L7.1@-10313.21,11151.47 -10295.7,11168.98 L10.2@-10295.7,11172.43
N15957559: C28.2 L12.2 | length 27.4
  BOTTOM w12: L12.2@-10380.52,10945 ccw(c-10393.63,10958.11) -10375.09,10958.11 C28.2@-10375.09,10970.99
N15957739: C35.1 R119.2 X4.1 | length 97.4
  BOTTOM w4: R119.2@-10033.44,11198.57 -10017.23,11182.36 C35.1@-9989.83,11182.36 -9995.24,11187.77 X4.1@-9995.24,11227.21
N15961979: R120.2 TP12.1 U9.18 | length 131
  TOP w4: TP12.1@-10435.19,11337.51 -10434.05,11337.51 v5(-10401.56,11370) v5@-10400,11370
  BOTTOM w4: R120.2@-10436.01,11327.28 -10401.56,11361.73 v5(-10401.56,11370) -10396,11370 -10394.06,11371.94 U9.18@-10377.05,11371.94
N15962009: R121.2 TP14.1 U9.19 | length 106.1
  TOP w4: TP14.1@-10435.19,11408.07 -10417.45,11408.07 v5(-10401,11391.62)
  BOTTOM w4: R121.2@-10436.05,11376.84 -10421.27,11391.62 v5(-10401,11391.62) U9.19@-10377.05,11391.62
N15967993: B1.8 U9.2 | length 47
  BOTTOM w12: B1.8@-10152.64,11198.95 U9.2@-10152.64,11245.95
N15968005: B1.9 U9.1 | length 47
  BOTTOM w12: B1.9@-10132.95,11198.95 U9.1@-10132.95,11245.95
N15968666: B1.1 C45.1 | length 37
  BOTTOM w12: B1.1@-10132.95,11149.73 ccw(c-10089.04,11149.73) -10120.09,11118.68 C45.1@-10118.31,11116.9
N15969255: C45.2 D27.2 J12.1 | length 394.2
  BOTTOM w12: C45.2@-10102.75,11101.34 cw(c-10345.45,10858.64) -10002.22,10858.64 D27.2@-10002.22,10781 J12.1@-10002.22,10734.02
N15997187: L14.1 U17.2 U17.3
N15997222: R123.1 R124.1 U17.1 | length 135.2
  TOP w8: v5(-12366.3,9844.7) -12348.49,9844.7 R124.1@-12339,9835.21 -12336.42,9835.21 R123.1@-12300,9798.79
  BOTTOM w8: U17.1@-12416.2,9844.7 v5(-12366.3,9844.7)
N15997584: C52.1 U17.14 | length 57.2
  TOP w15: C52.1@-12549.34,9694.59 -12540.22,9685.47 v5(-12540.22,9661.22)
  BOTTOM w8: v5(-12540.22,9661.22) U17.14@-12540.22,9681.31
N15997644: L17.1 U17.27
N15998811: L16.1 U17.29
N16004890: R227.1 U1.B7 | length 144.7
  BOTTOM w3.2: -12124.41,11018.11 -12124.41,11039.86 U1.B7@-12114.61,11049.66
  BOTTOM w4: -12124.41,11018.11 -12124.41,10920.18 R227.1@-12116.5,10912.27
N16005116: C126.1 U1.C2 X5.1 | length 288.9
  BOTTOM w3.2: -12242,11058.7 -12241.24,11059.46 -12222.93,11059.46 U1.C2@-12213.04,11069.35
  BOTTOM w4: -12242,11058.7 -12243,11058.7 -12282,11019.7 -12282,10937.04 -12274.17,10929.21 C126.1@-12274.17,10912.36 -12274.17,10894.87 -12258.23,10878.93 -12243.23,10878.93 -12230,10865.7 X5.1@-12230,10850.7
N16005124: C127.1 U1.C1 X5.2 | length 282.5
  BOTTOM w4: X5.2@-12350,10850.7 -12350,10865.7 -12336.77,10878.93 -12321.77,10878.93 -12309.87,10890.83 C127.1@-12309.87,10912.04 -12291,10930.91 -12291,11022.07 -12243.72,11069.35 U1.C1@-12232.72,11069.35
N16005316: R274.1 U1.A12 | length 150.7
  TOP w4: v5(-12016.18,11013.18) -12016.18,10970.18 -11988,10942 R274.1@-11988,10891
  BOTTOM w4: v5(-12016.18,11013.18) U1.A12@-12016.18,11029.98
N16005478: R149.1 U1.E21 | length 356.4
  TOP w4: v5(-11839.02,11125.93) -11839.02,11105.97 -11849.7,11095.29 -11849.7,11039.59 -11799.3,10989.2 -11715.2,10989.2 -11706,10980 -11654.16,10980 R149.1@-11634.21,10999.95
  BOTTOM w4: U1.E21@-11839.02,11108.72 v5(-11839.02,11125.93)
N16025692: R131.1 U1.AE10 | length 389.3
  LYR3 w3.8: v1(-12117,11823) -12135,11805 -12135,11713.09 -12047,11625.11 -12047,11567.7 v1(-12060,11554.7)
  BOTTOM w3.2: v1(-12060,11554.7) -12055.56,11550.26 U1.AE10@-12055.56,11502.42
  BOTTOM w4: R131.1@-12124.14,11836.41 -12124.14,11828.14 -12119,11823 v1(-12117,11823)
N16025696: R130.1 U1.AC9 | length 45.1
  TOP w4: R130.1@-12106,11486.49 -12092.3,11472.79 v5(-12092.3,11464.81)
  BOTTOM w4: v5(-12092.3,11464.81) -12090.54,11463.05 U1.AC9@-12075.24,11463.05
N16034849: L18.1 U12.5
N16034871: R260.1 R261.1 U12.3 | length 124.3
  BOTTOM w8: R261.1@-12150.42,10513 R261.1@-12150.42,10513 R260.1@-12150.38,10475 -12148.97,10473.59 U12.3@-12148.97,10389.31
N16038113: C136.1 U1.G9 | length 18.7
  BOTTOM w8: v5(-12076.92,11130.09) -12075.24,11131.77 U1.G9@-12075.24,11148.09
N16038120: C137.1 U1.H11 | length 29.2
  TOP w8: v5(-12033,11148.7) -12032.34,11148.04 C137.1@-12024.3,11148.04
  BOTTOM w8: U1.H11@-12035.87,11167.78 -12035.87,11151.57 v5(-12033,11148.7)
N16038127: C138.1 U1.J19 | length 44.6
  TOP w10: v5(-11853,11184.9) -11842.66,11174.56 C138.1@-11842.66,11171
  BOTTOM w4: v5@-11853.4,11184.9 v5(-11853,11184.9)
  BOTTOM w10: U1.J19@-11878.39,11187.46 -11877.33,11186.4 -11854.9,11186.4 v5@-11853.4,11184.9
N16038134: C139.1 U1.H17 | length 39.9
  TOP w4: v5(-11899.8,11146.5) -11898.26,11148.04 C139.1@-11889.3,11148.04
  BOTTOM w4: U1.H17@-11917.76,11167.78 -11917.76,11164.46 v5(-11899.8,11146.5)
N16038141: C140.1 U1.U7 | length 27.5
  TOP w10: v5(-12132.63,11345.59) -12128.08,11341.04 C140.1@-12125.3,11341.04
  BOTTOM w10: v5(-12132.63,11345.59) -12131.98,11344.94 U1.U7@-12114.61,11344.94
N16038148: C141.1 U1.P19 | length 42
  TOP w8: v5(-11877,11308.7) -11872.31,11304.01 C141.1@-11860.3,11304.01
  BOTTOM w10: U1.P19@-11878.39,11285.88 -11878.39,11307.31 v5(-11877,11308.7)
N16038155: C142.1 U1.W17 | length 31.7
  TOP w8: v5(-11917.76,11401) -11916.7,11401 -11915.3,11402.4 C142.1@-11903.34,11402.4
  BOTTOM w8: U1.W17@-11917.76,11384.31 v5(-11917.76,11401)
N16038162: C143.1 U1.K18 | length 43.3
  TOP w8: v5(-11916,11190.7) -11906.66,11200.04 C143.1@-11901.3,11200.04
  BOTTOM w8: v5(-11916,11190.7) -11899.56,11207.14 U1.K18@-11898.08,11207.14
N16038169: C144.1 U1.H15 | length 17.8
  BOTTOM w8: U1.H15@-11957.13,11167.78 -11957.13,11155.83 -11955,11153.7 -11955,11151.47 v5(-11954.6,11151.07)
N16100484: R273.1 U1.A18 | length 114.3
  TOP w4: v5(-11853,10946) -11850.05,10943.05 R273.1@-11850.05,10935.58
  BOTTOM w3.2: U1.A18@-11898.08,11029.98 -11898.08,11003.78 -11855.1,10960.8 v5@-11855.1,10948.1
  BOTTOM w4: v5@-11855.1,10948.1 v5(-11853,10946)
N16120392: R145.2 U1.AC24 | length 149.6
  BOTTOM w3.2: U1.AC24@-11779.96,11463.05 -11770.16,11472.85 -11723.85,11472.85
  BOTTOM w4: -11723.85,11472.85 -11642.47,11472.85 R145.2@-11636.76,11478.56
N16127002: C247.1 C250.1 FB22.1 U7.18 | length 96.5
  TOP w10: FB22.1@-11212.27,10215.45 -11204.6,10207.78 v5(-11183.28,10207.78) -11182.61,10207.78 C247.1@-11180.73,10209.66 -11156.52,10209.66 C250.1@-11148.73,10217.45
  BOTTOM w10: U7.18@-11183.28,10182 v5(-11183.28,10207.78)
N16127031: C248.1 C252.1 C269.1 FB23.1 U7.23 | length 126.6
  TOP w10: FB23.1@-11341.34,10215.45 C252.1@-11302.86,10215.45 -11295.41,10208 v5(-11282,10208) ; C248.1@-11281.66,10182.06 -11282,10182.4 v5(-11282,10208) ; C269.1@-11270.34,10208.66 -11281.34,10208.66 v5(-11282,10208)
  BOTTOM w10: v5(-11282,10208) -11281.7,10207.7 U7.23@-11281.7,10182
N16127607: C249.1 C251.1 FB20.1 U7.1 U7.34 | length 180.3
  TOP w10: v1(-11512.21,10229.25) -11511.88,10228.92 C251.1@-11483.32,10228.92 -11483.32,10214.33 FB20.1@-11501.53,10196.12 ; v1(-11165,10469) -11137.96,10469 C249.1@-11135.68,10471.28
  BOTTOM w10: v1(-11512.21,10229.25) U7.34@-11486.43,10229.25 ; v1(-11165,10469) -11165,10475 -11159.81,10480.19 -11159.81,10493.06 -11148.03,10504.84 U7.1@-11136.03,10504.84
N16129080: C239.1 C271.1 FB19.1 U7.28 | length 98.1
  TOP w10: FB19.1@-11418.8,10215.45 -11386.71,10215.45 v5(-11380.13,10208.87) -11380.13,10189.73 C239.1@-11387.66,10182.2
  BOTTOM w10: U7.28@-11380.13,10182 v5(-11380.13,10208.87)
N16149634: C234.1 R67.2 U11.4 | length 100.6
  BOTTOM w4: U11.4@-10954.64,10803.98 -10954.64,10820.36 -10944.91,10830.09 C234.1@-10944.91,10863.36 -10944.91,10883.63 -10944.83,10883.71 R67.2@-10944.83,10900.56
N16149646: C235.1 R68.1 U11.5 | length 113.6
  BOTTOM w4: U11.5@-10954.64,10630.76 -10954.64,10616.64 -10947,10609 -10908.79,10609 C235.1@-10901.36,10616.43 R68.1@-10861.44,10616.43
N16164784: C256.2 D73.2 J3.1 | length 82.1
  BOTTOM w12: C256.2@-10197,12226.79 D73.2@-10160,12226.78 -10115.54,12226.78 ccw(c-10115.54,12227.53) J3.1@-10115.01,12227
N16165479: C257.2 D74.2 J5.1 | length 100.9
  BOTTOM w12: C257.2@-10161.79,11877 -10126.22,11877 D74.2@-10126,11877.22 -10098.63,11877.22 cw(c-10098.63,11837.58) -10070.6,11865.61 J5.1@-10066,11861.01
N16172168: D61.2 R70.1 | length 58.5
  TOP w4: D61.2@-12016,9823.5 -11972.35,9823.5 R70.1@-11961.86,9833.99
N16177059: R15.1 TP1.1 U3.H5 | length 73.3
  TOP w4: TP1.1@-12569.51,11877.14 -12569.51,11861.21 v5(-12561,11852.7) -12557.33,11849.03 R15.1@-12557.33,11836.56
  BOTTOM w4: U3.H5@-12586.33,11847.13 -12566.57,11847.13 v5(-12561,11852.7)
N16199587: Q3.1 R166.2 | length 38.5
  BOTTOM w4: Q3.1@-10168.35,10099.69 -10166.87,10101.17 R166.2@-10166.87,10137.61
N16199595: LED1.2 Q4.3 | length 1196.8
  TOP w4: v5(-9889.14,9487.86) LED1.2@-9887.76,9487.86
  BOTTOM w4: Q4.3@-10077.44,10050.87 -10077.44,9968.88 -10139,9907.32 -10139,9861.33 -10312.34,9687.99 -10312.34,9464.01 -10217.99,9369.66 -10065.01,9369.66 -9969.67,9465 -9912,9465 v5(-9889.14,9487.86)
N16199659: Q4.1 R167.2 | length 38.5
  BOTTOM w4: Q4.1@-10097.13,10099.69 -10095.65,10101.17 R167.2@-10095.65,10137.61
N16200287: LED2.2 Q3.3 | length 1178.8
  TOP w4: v5(-9887.76,9455.24) LED2.2@-9887.76,9456.22
  BOTTOM w4: Q3.3@-10148.66,10050.87 -10148.66,9865.34 -10322,9692 -10322,9460 -10222,9360 -10061,9360 -9965.76,9455.24 v5(-9887.76,9455.24)
N16213182: C128.1 U1.B2 X6.3 | length 364.7
  BOTTOM w3.2: -12214,11005.7 -12222.84,11014.54 -12222.84,11039.86 U1.B2@-12213.04,11049.66
  BOTTOM w4: -12214,11005.7 -12214,10954 -12150,10890 -12150,10854.7 -12136,10840.7 -12136,10807.05 C128.1@-12116.99,10788.04 -12116.99,10787.71 -12138.22,10766.48 X6.3@-12138.22,10741.7
N16213274: R127.1 U1.A3 | length 249.5
  BOTTOM w4: U1.A3@-12193.35,11029.98 -12193.35,11017.35 -12205,11005.7 -12205,10958 -12142,10895 -12142,10860.71 R127.1@-12107.13,10825.84
N16213278: C129.1 R127.2 X6.1 | length 186.3
  BOTTOM w4: R127.2@-12070.71,10825.84 -12070.71,10794.62 C129.1@-12077.97,10787.36 -12077.97,10786.73 -12091,10773.7 -12091,10707.2 -12052.66,10668.86 X6.1@-12047.66,10668.86
N16222390: Q5.3 Q12.1 U22.1 | length 236
  TOP w15: v5(-10332,10395) -10321,10406 v5(-10135,10406)
  BOTTOM w15: Q12.1@-10167.01,10400.09 -10151.91,10400.09 -10146,10406 v5(-10135,10406)
N16646883: R94.2 R132.1 U1.AC11 | length 543.8
  LYR3 w3.8: v1(-12060,11821) -12073.4,11821 -12111,11783.4 -12111,11711.7 -12029,11629.7 -12029,11563.7 -12021,11555.7 v1(-12021,11554.7)
  BOTTOM w3.2: U1.AC11@-12035.87,11463.05 -12035.87,11468.64 -12026.02,11478.49 -12026.02,11511.25 -12029,11514.23 -12029,11531.7 -12021,11539.7
  BOTTOM w4: R94.2@-12088.79,11911 -12068,11890.21 -12068,11855.27 R132.1@-12049.14,11836.41 -12049.14,11831.86 v1(-12060,11821) ; -12021,11539.7 v1(-12021,11554.7)
N16650018: C131.1 R133.2 U8.1 | length 152.7
  BOTTOM w4: U8.1@-12146.9,9881.87 -12146.9,9926.82 C131.1@-12172.14,9952.06 -12156,9968.2 -12156,9984.87 R133.2@-12133.01,10007.86
N16757495: C204.1 FL2.2 U16.1
N16757655: R210.2 U16.3 | length 64.1
  BOTTOM w4: R210.2@-12096.73,12052.84 -12079.88,12052.84 -12076.86,12055.86 U16.3@-12033.84,12055.86
N16761119: J17.18 R135.2 | length 1320.6
  TOP w4: J17.18@-11443.35,12150.73 -11443.35,12112.35 v1(-11428,12097)
  LYR3 w3.8: v1(-11428,12097) -11420.8,12089.8 -11420.8,11995.76 -11337,11911.96 -11337,11772.52 -11366.52,11743 -11366.52,11610.52 -11344,11588 -11296.1,11588 -11208,11499.9 -11208,11499.81 -11171.4,11463.21 -11171.4,11347.48 -11162.2,11338.28 -11162.2,11323.28 -11133,11294.08 -11133,11218.81 -11124,11209.8 -11124,11059 -11107,11042 v1(-11107,11022)
N16761165: R153.1 U1.AA14 | length 502.4
  LYR3 w3.8: v1(-12095,11822) -12123,11794 -12123,11712.13 -12039.2,11628.35 -12039.2,11464.9 -11998.2,11423.9 v1(-11998.2,11422.77)
  BOTTOM w4: v1(-12095,11822) -12086.14,11830.86 R153.1@-12086.14,11836.41 ; v1(-11998.2,11422.77) -11997.57,11423.4 -11997.4,11423.4 -11997.12,11423.68 U1.AA14@-11976.82,11423.68
N16786907: R247.1 U1.L23 | length 588.1
  BOTTOM w3.2: U1.L23@-11799.03,11226.21 -11789.82,11217 -11739,11217
  BOTTOM w4: U1.L23@-11799.65,11226.83 U1.L23@-11799.03,11226.21 ; -11739,11217 -11725.81,11217 -11722.18,11220.63 -11635.19,11220.63 -11554.66,11140.1 -11554.66,11117.84 -11513.82,11077 -11382.68,11077 -11343.32,11116.36 R247.1@-11306,11116.36
N16786926: R69.1 U1.M24 | length 571.1
  BOTTOM w3.2: U1.M24@-11779.96,11246.52 -11770.16,11256.32 -11725.32,11256.32
  BOTTOM w4: -11725.32,11256.32 -11724,11255 -11624.28,11255 -11522.66,11153.38 -11522.66,11142.2 -11512.32,11131.86 -11403.62,11131.86 -11403.48,11132 -11390.26,11132 R69.1@-11306,11216.26
N16786954: R71.1 U1.U23 | length 789.6
  LAY6 w3.8: -11697,11333.06 -11689.94,11333.06 -11661.05,11361.95 -11184.05,11361.95 -11178.35,11367.65 v3(-11141.9,11367.65)
  LAY6 w4: v3(-11836.88,11343.59) -11799.92,11343.59 -11789.39,11333.06 -11697,11333.06
  BOTTOM w3.2: v3(-11836.88,11343.59) -11836.88,11342.2 -11833.68,11339 -11830,11339 -11826.14,11335.14 -11809.45,11335.14 U1.U23@-11799.65,11344.94
  BOTTOM w4: R71.1@-11148.44,11340 -11148.44,11359.14 -11144,11363.58 -11144,11365.55 v3(-11141.9,11367.65)
N16786975: R72.1 U1.L25 | length 556.5
  BOTTOM w4: U1.L25@-11760.28,11226.83 -11726.17,11226.83 -11724.37,11228.63 -11631.87,11228.63 -11546.66,11143.42 -11546.66,11121.16 -11510.5,11085 -11386,11085 -11316.14,11154.86 R72.1@-11306,11154.86
N16788057: D66.2 R184.2 | length 53.5
  BOTTOM w4: D66.2@-12939.58,11622.04 -12938.36,11622.04 -12917.56,11642.84 R184.2@-12917.56,11665.71
N16788120: D23.2 R185.2 | length 77.1
  BOTTOM w4: R185.2@-12881.87,11738.84 -12881.87,11733.91 -12831.36,11683.4 D23.2@-12830.66,11683.4
N16791385: R245.1 U1.L24 | length 593.6
  BOTTOM w3.2: U1.L24@-11779.96,11226.83 -11770.16,11236.63 -11721.63,11236.63
  BOTTOM w4: -11721.63,11236.63 -11628.55,11236.63 -11538.66,11146.74 -11538.66,11124.48 -11507.18,11093 -11390,11093 -11317,11166 -11317,11174.26 R245.1@-11306,11185.26
N16791404: R246.1 U1.P25 | length 506.3
  BOTTOM w4: U1.P25@-11760.28,11285.88 -11657.2,11285.88 -11650.32,11279 -11614.32,11279 -11536.32,11201 -11366,11201 -11320.36,11246.64 R246.1@-11308,11246.64
N16822608: R217.1 U1.B8 | length 166.6
  BOTTOM w3.2: -12104.81,11023.9 -12104.81,11039.77 U1.B8@-12094.92,11049.66
  BOTTOM w4: -12104.81,11023.9 -12113,11015.71 -12113,10938 -12092.82,10917.82 R217.1@-12073.86,10917.82
N16846143: C267.1 C268.1 FB21.2 J8.39 | length 10.3
  BOTTOM w10: C267.1@-12828,12191.7 v5(-12817.7,12191.7)
  other v5: -12818,12209
N16854428: R244.2 U1.C13 | length 219.7
  BOTTOM w3.2: U1.C13@-11996.5,11069.35 -12006.38,11059.47 -12006.38,11022.48 -12003.38,11019.48 -12003.38,11002.63 -12014.6,10991.41 -12014.6,10975.62 -12003.08,10964.1 -11978.95,10964.1 -11973.5,10958.65 -11967.82,10958.65 -11967.77,10958.6 -11951.79,10958.6 -11946,10952.81 -11946,10936.94 -11952.8,10930.14
  BOTTOM w4: R244.2@-11952.8,10917.64 -11952.8,10930.14
N16855227: LED3.1 R201.2 | length 1931.3
  TOP w4: LED3.1@-12948.18,10487.56 -12948.18,10504.56 -12936.74,10516 v3(-12899,10516)
  LYR3 w3.8: v10(-11682,10439) -11682,10474 -11676.2,10479.8 -11676.2,10529.98 -11590.9,10615.28 -11590.9,10703.66 -11553.5,10741.06 v1(-11553.5,10965)
  LAY6 w3.8: v3(-12899,10516) -12862,10516 -12804.56,10458.56 -12065.56,10458.56 -12046,10439 v10(-11682,10439)
  BOTTOM w3.8: v1(-11553.5,10965) -11553.5,10971.5 -11535.79,10989.21 R201.2@-11535.79,10989.95
N16855229: LED4.1 R202.2 | length 0.6
  BOTTOM w4: v5(-12946.86,10450.86) R202.2@-12946.25,10450.86
N16855231: LED5.1 R203.2 | length 1.6
  BOTTOM w4: v5(-12947.86,10413.86) R203.2@-12946.29,10413.86
N16855233: LED6.1 R204.2 | length 1.1
  BOTTOM w4: v5(-12946.44,10377.56) R204.2@-12945.33,10377.56
N16855235: LED7.1 R205.2 | length 2.1
  BOTTOM w4: v5(-12947.44,10340.56) R205.2@-12945.37,10340.56
N16855237: LED8.1 R206.2 | length 1143.2
  TOP w4: v5(-9945.5,9519.5) LED8.1@-9927.76,9519.5
  BOTTOM w4: R206.2@-9984,10043.5 -9984,10017 -9996,10005 -10030,10005 -10131,9904 -10131,9827.01 -10284.34,9673.67 -10284.34,9481.33 -10206.67,9403.66 -10079.33,9403.66 -9963.49,9519.5 v5(-9945.5,9519.5)
N16855239: LED9.1 R236.2 | length 1189.4
  TOP w4: v5(-9946,9551.14) LED9.1@-9927.76,9551.14
  BOTTOM w4: R236.2@-9985,10075.14 -9975.14,10075.14 -9963,10063 -9963,10025 -9992.19,9995.81 -10026.19,9995.81 -10121.81,9900.19 -10121.81,9823.2 -10275.15,9669.86 -10275.15,9485.14 -10202.86,9412.85 -10083.14,9412.85 -9946,9549.99 v5(-9946,9551.14)
N16855241: LED10.1 R237.2 | length 1245
  TOP w4: v5(-9945.78,9582.78) LED10.1@-9927.76,9582.78
  BOTTOM w4: R237.2@-9985,10106.78 -9970.78,10106.78 -9955,10091 -9955,10021 -9988.67,9987.33 -10022.67,9987.33 -10113.33,9896.67 -10113.33,9819.68 -10266.67,9666.34 -10266.67,9488.66 -10199.34,9421.33 -10086.66,9421.33 -9995,9512.99 -9995,9553 -9965.22,9582.78 v5(-9945.78,9582.78)
N16855243: LED11.1 R238.2 | length 1282.2
  TOP w4: v5(-9947.58,9614.42) LED11.1@-9927.76,9614.42
  BOTTOM w4: R238.2@-9985,10138.42 -9962.42,10138.42 -9946,10122 -9946,10018 -9985.15,9978.85 -10019.15,9978.85 -10104.85,9893.15 -10104.85,9816.16 -10258.19,9662.82 -10258.19,9492.18 -10195.82,9429.81 -10090.18,9429.81 -10003,9516.99 -10003,9559 v5(-9947.58,9614.42)
N16855367: LED10.2 Q10.3 | length 4092.9
  LYR3 w3.8: v10(-10208,12089) -10176,12057 -10176,11949.12 -9979,11752.12 -9979,11529.01 -9885.99,11436 -9885.99,10272.01 -9970,10188 -9970,10074 -10166,9878 -10166,9720 -10254,9632 -10254,9469 -10205,9420 -9969,9420 -9927,9462 -9927,9545 v1(-9890,9582)
  LAY6 w3.8: v3(-10799.29,11911.29) -10799.29,11912.71 -10669,12043 -10385,12043 -10340,12088 -10209,12088 v10(-10208,12089)
  BOTTOM w4: Q10.3@-10799.29,11890 v3(-10799.29,11911.29)
N16855418: Q10.1 R239.2 | length 40.8
  BOTTOM w4: Q10.1@-10848.11,11870.31 -10842.21,11864.41 R239.2@-10842.21,11832
N16856006: C261.1 U18.1 X7.2 | length 166.8
  BOTTOM w4: U18.1@-11790.66,10247.56 -11790.66,10194.76 -11799.71,10185.71 C261.1@-11799.71,10168.86 -11799.71,10152.01 -11788.1,10140.4 -11770.68,10140.4 -11757.45,10127.17 X7.2@-11757.45,10112.17
N16856066: R162.2 R163.2 U18.7 | length 118.7
  TOP w4: v5(-11839,10420) -11839,10427 -11827.21,10438.79 R162.2@-11827.21,10455 R163.2@-11827.21,10493
  BOTTOM w4: U18.7@-11840.66,10460.16 -11840.66,10421.66 v5(-11839,10420)
N16856127: C265.1 U18.2 X7.1 | length 153.5
  BOTTOM w4: X7.1@-11877.45,10112.17 -11877.45,10127.17 -11864.22,10140.4 -11864.22,10141.85 C265.1@-11837.21,10168.86 -11837.21,10185.71 -11840.66,10189.16 U18.2@-11840.66,10247.56
N16856194: D26.2 J10.2 U18.3 | length 417
  TOP w15: J10.2@-12255.33,10200.61 -12129.15,10200.61 -12120.01,10191.47 D26.2@-12097.66,10191.47 -11904.53,10191.47 v5(-11890,10206)
  BOTTOM w15: U18.3@-11890.66,10247.56 -11890,10246.9 v5(-11890,10206)
N16966182: R251.1 U1.A23 | length 241.4
  BOTTOM w4: U1.A23@-11799.65,11029.98 -11773.37,11003.7 -11746,11003.7 -11698.3,10956 -11653.91,10956 R251.1@-11607.91,10910
N17041478: D49.2 R53.2 | length 53.7
  BOTTOM w4: R53.2@-12881.87,11777.2 -12865.02,11777.2 -12858.99,11783.23 D49.2@-12830.66,11783.23
N17059577: Q5.1 Q12.3 R59.1 | length 502.8
  TOP w4: v5(-10057,10305) -10057,10394.98 v5(-10044.49,10407.49)
  BOTTOM w4: Q5.1@-10289,10424.09 -10283.09,10430 -10123,10430 -10100.49,10407.49 v5(-10044.49,10407.49) ; Q12.3@-10167.01,10348.91 -10125.66,10348.91 R59.1@-10118.95,10342.2 -10118.95,10323.95 -10100,10305 v5(-10057,10305)
N17059597: Q12.2 Q12.5 Q12.6 R56.1 | length 161.1
  BOTTOM w4: Q12.5@-10226.07,10374.5 -10197,10374.5 ; Q12.6@-10226.07,10400.09 -10203.09,10400.09 -10197,10394 -10197,10374.5 ; R56.1@-10118.95,10381.5 -10125.95,10374.5 Q12.2@-10167.01,10374.5 -10197,10374.5
N17096912: D50.1 D51.1 R60.2 U21.3 | length 149.3
  BOTTOM w4: U21.3@-10680.17,10576.1 -10688.9,10576.1 -10697,10568 D50.1@-10697,10519.95 -10696.47,10519.42 D51.1@-10696.47,10481.95 -10695.09,10483.33 R60.2@-10654.2,10483.33
N17226364: R256.1 U7.31 | length 186.9
  BOTTOM w4: R256.1@-11608.55,10154 -11602.55,10160 -11451,10160 -11439.18,10171.82 U7.31@-11439.18,10182
N17226817: D55.2 F1.1 | length 44.3
  BOTTOM w20: F1.1@-10921.43,10420 -10921.18,10419.75 D55.2@-10877.27,10419.75
N17232817: C61.1 C243.1 C276.1 FB24.1 U7.9 U7.13 U7.19 | length 182.3
  TOP w4: C61.1@-11170.29,10347.07 -11170,10347.36 v1(-11163.64,10347.36)
  TOP w10: v1(-11175.38,10268.62) -11172.52,10271.48 C243.1@-11172.52,10279.52
  TOP w15: C61.1@-11172.88,10344.48 -11170.29,10347.07 FB24.1@-11130.25,10347.07
  BOTTOM w10: v1(-11238,10207.78) -11237.22,10207 -11215.96,10207 -11202.96,10194 U7.19@-11202.96,10182 ; v1(-11175.38,10268.62) U7.13@-11136.03,10268.62 ; v1(-11163.64,10347.36) U7.9@-11136.03,10347.36
N17283785: D22.2 J21.2
N17295692: J24.14 R34.2 | length 319.2
  BOTTOM w4: R34.2@-10884.86,9627.32 -10884.86,9610.47 -10902,9593.33 -10902,9506.8 J24.14@-10766.56,9371.36
N17295713: J24.13 R165.2 | length 3348.5
  LYR3 w3.8: v1(-11197.93,12073.93) -11183.93,12073.93 -11058.04,11948.04 -10936.96,11948.04 -10770.92,11782 -10762,11782 -10718.6,11738.6 -10718.6,11346.06 -10720.9,11343.76 -10720.9,11332.24 -10717,11328.34 -10717,11135 -10729,11123 -10729,10873 -10717,10861 -10717,10792 -10637.7,10712.7 -10637.7,10515.3 -10684.6,10468.4 -10684.6,10404.6 -10660.2,10380.2 -10660.2,9899.76 -10744.2,9815.76 -10744.2,9764.8 -10799.6,9709.4 -10943.6,9709.4 v1(-10962.14,9690.86)
  BOTTOM w4: R165.2@-11197.93,12034.83 v1(-11197.93,12073.93) ; v1(-10962.14,9690.86) -10962.14,9669.94 -10942.45,9650.25 -10942.45,9497.45 -10866.56,9421.56 J24.13@-10866.56,9371.36
N17295734: J24.11 R35.2 R39.2 | length 3621.6
  LYR3 w3.8: v1(-11279.5,12044) -11193,12044 -11077,11928 -10950,11928 -10855,11833 -10855,11739.04 -10734.2,11618.24 -10734.2,11352.54 -10742,11344.74 -10742,11139 -10748,11133 -10748,10866 -10734.2,10852.2 -10734.2,10783.2 -10653.3,10702.3 -10653.3,10526.7 -10700.2,10479.8 -10700.2,10395.2 -10675.8,10370.8 -10675.8,9906.24 -10759.8,9822.24 -10759.8,9771.28 -10806.08,9725 -11110.78,9725 v1(-11146.39,9689.39)
  BOTTOM w4: J24.11@-11288.6,9371.36 -11231.96,9428 -11171,9428 -11126.7,9472.3 -11126.7,9571.32 R39.2@-11182.7,9627.32 -11146.39,9663.63 v1(-11146.39,9689.39) ; R35.2@-11279.5,12034.83 v1(-11279.5,12044)
N17295760: J24.12 R40.2 R164.2 | length 3437.3
  LYR3 w3.8: v1(-11239.13,12057.9) -11189,12057.9 -11068.12,11937.02 -10936.98,11937.02 -10726.4,11726.44 -10726.4,11349.3 -10732,11343.7 -10732,11134 -10738,11128 -10738,10869 -10725,10856 -10725,10787 -10645.5,10707.5 -10645.5,10519.5 -10692.4,10472.6 -10692.4,10400.4 -10668,10376 -10668,9903 -10752,9819 -10752,9768.04 -10802.84,9717.2 -11009.12,9717.2 v1(-11035.66,9690.66)
  BOTTOM w4: R40.2@-11239.13,12034.83 v1(-11239.13,12057.9) ; J24.12@-11188.6,9371.36 -11070.86,9489.1 R164.2@-11070.86,9627.32 -11035.66,9662.52 v1(-11035.66,9690.66)
N17297363: C89.1 R248.1 Y2.3 | length 92
  BOTTOM w4: Y2.3@-11474.1,11962.91 -11458.18,11978.83 R248.1@-11423.53,11978.83 C89.1@-11423.53,12013.68
N17316096: D32.1 D33.1 D54.1 Q13.2 R36.2 | length 162.2
  BOTTOM w4: Q13.2@-11021.74,11624.31 -10998.54,11624.31 R36.2@-10989.85,11633 -10961.65,11633 D32.1@-10950.65,11644 D54.1@-10950.65,11685.85 D33.1@-10950.65,11727
N17355379: L15.4 R219.1 U1.AE3 | length 1222.5
  BOTTOM w3.2: -12231.25,11567.2 -12231.25,11566.4 -12231.2,11566.35 -12231.2,11559.19 -12193.35,11521.34 U1.AE3@-12193.35,11502.42
  BOTTOM w3.3: R219.1@-12467.41,12214.57 L15.4@-12449.2,12214.57 -12442.43,12214.57 -12431.35,12225.65 -12425.3,12225.65 -12422,12222.35 -12422,12202.99 -12442.69,12182.3 -12606.69,12182.3 -12635.3,12153.69 -12635.3,12082.31 -12548.99,11996 -12406,11996 -12379,11969 -12379,11843 -12256,11720 -12256,11608 -12231.25,11583.25 -12231.25,11567.2
N17355388: L15.1 R225.1 U1.AD4 | length 1264.5
  BOTTOM w3.2: -12219.95,11567.2 -12219.95,11566.4 -12220,11566.35 -12220,11560 -12183.46,11523.46 -12183.46,11492.54 U1.AD4@-12173.66,11482.74
  BOTTOM w3.3: R225.1@-12467.41,12248.03 L15.1@-12449.2,12248.03 -12442.03,12248.03 -12430.95,12236.95 -12420.61,12236.95 -12410.7,12227.04 -12410.7,12198.3 -12438,12171 -12602,12171 -12624,12149 -12624,12087 -12544.3,12007.3 -12401.31,12007.3 -12367.7,11973.69 -12367.7,11847.69 -12244.7,11724.69 -12244.7,11612.69 -12219.95,11587.94 -12219.95,11567.2
N17355497: L20.1 R264.1 U1.AD5 | length 1302.9
  BOTTOM w3.2: -12393.92,12034 -12393.17,12034 -12393.12,12033.95 -12389.26,12033.95 -12389.21,12033.9 -12384.9,12033.9 -12338.72,11987.72 -12338.72,11861.72 -12206,11729 -12206,11633 -12195.08,11622.08 -12195.08,11582.15 ; -12195.05,11582.12 -12195.05,11561.05 -12163.78,11529.78 -12163.78,11492.54 U1.AD5@-12153.98,11482.74
  BOTTOM w3.3: R264.1@-12467.25,12319.44 L20.1@-12449.04,12319.44 -12441.43,12319.44 -12430.35,12308.36 -12402.37,12308.36 -12381,12286.99 -12381,12184.01 -12420.31,12144.7 -12534.31,12144.7 -12561.7,12117.31 -12561.7,12059.69 -12536.01,12034 -12393.92,12034
N17355524: L20.4 R265.1 U1.AE4 | length 1261.1
  BOTTOM w3.2: -12393.92,12022.7 -12389.54,12022.7 -12349.92,11983.08 -12349.92,11857.08 -12217.2,11724.36 -12217.2,11628.36 -12206.3,11617.46 -12206.3,11558.3 -12173.66,11525.66 U1.AE4@-12173.66,11502.42
  BOTTOM w3.3: R265.1@-12467.25,12285.98 L20.4@-12449.04,12285.98 -12441.03,12285.98 -12429.95,12297.06 -12407.06,12297.06 -12392.3,12282.3 -12392.3,12188.7 -12425,12156 -12539,12156 -12573,12122 -12573,12055 -12540.7,12022.7 -12393.92,12022.7
N17416044: R276.1 U22.2 | length 47.6
  BOTTOM w4: U22.2@-10342.63,10270.56 -10319.65,10270.56 R276.1@-10302.21,10288
OLDI0_A0_N: J8.3 U1.AA5 | length 855.7
  TOP w3.3: v3(-12174.17,11903.87) -12165.49,11895.19 -12146.51,11895.19 -12104.32,11937.38 -12104.32,12112.12 -12108.51,12116.31 J8.3@-12108.51,12148.55
  LAY6 w3: v3(-12174.17,11903.87) -12165,11894.7 -12141.55,11894.7 -12131.2,11884.35 -12131.2,11514.07 -12126,11508.87 -12126,11502.87 -12129,11499.87 -12131.51,11499.87 -12134.51,11496.87 -12134.51,11490.87 -12131.51,11487.87 -12129,11487.87 -12126,11484.87 -12126,11478.87 -12129,11475.87 -12131.51,11475.87 -12134.51,11472.87 -12134.51,11439.57 -12132,11437.06 v3(-12132,11423.68)
  BOTTOM w3.3: U1.AA5@-12153.98,11423.68 v3(-12132,11423.68)
OLDI0_A0_P: J8.2 U1.Y6 | length 862.8
  TOP w3.3: v3(-12174.17,11875.22) -12165.5,11883.89 -12141.81,11883.89 -12093.02,11932.68 -12093.02,12112.12 -12088.83,12116.31 J8.2@-12088.83,12148.55
  LAY6 w3: v3(-12174.17,11875.22) -12164.99,11884.4 -12145.82,11884.4 -12141.5,11880.08 -12141.5,11436.2 -12154.7,11423 v3(-12154.7,11404)
  BOTTOM w3.3: v3(-12154.7,11404) U1.Y6@-12134.3,11404
OLDI0_A1_N: J8.6 U1.AD3 | length 765.3
  TOP w3.3: v3(-12218.15,11927.13) -12210.3,11934.98 -12210.3,12014.69 -12163.38,12061.61 -12163.38,12112.11 -12167.57,12116.3 J8.6@-12167.57,12148.55
  LAY6 w3: v3(-12218.15,11927.13) -12209.3,11918.28 -12209.3,11584.43 -12196.3,11571.43 -12196.3,11558.43 -12192,11554.13 -12192,11497.66 -12194.13,11495.53 -12199.01,11493.99 -12202.78,11495.93 v3(-12210,11518.7)
  BOTTOM w3.2: v3(-12210,11518.7) -12203.15,11511.85 -12203.15,11492.54 U1.AD3@-12193.35,11482.74